# Altium PCB COMS0012_Comms_Board_Miniaturization.PcbDoc
Units mm, origin at the board's own origin, x right, y up, seen from the top; angles counter-clockwise.
Board outline 70 x 30 mm, 4 copper layers (Top, VCC, GND, Bottom); 55 components, 87 nets, 274 pads, 157 vias.
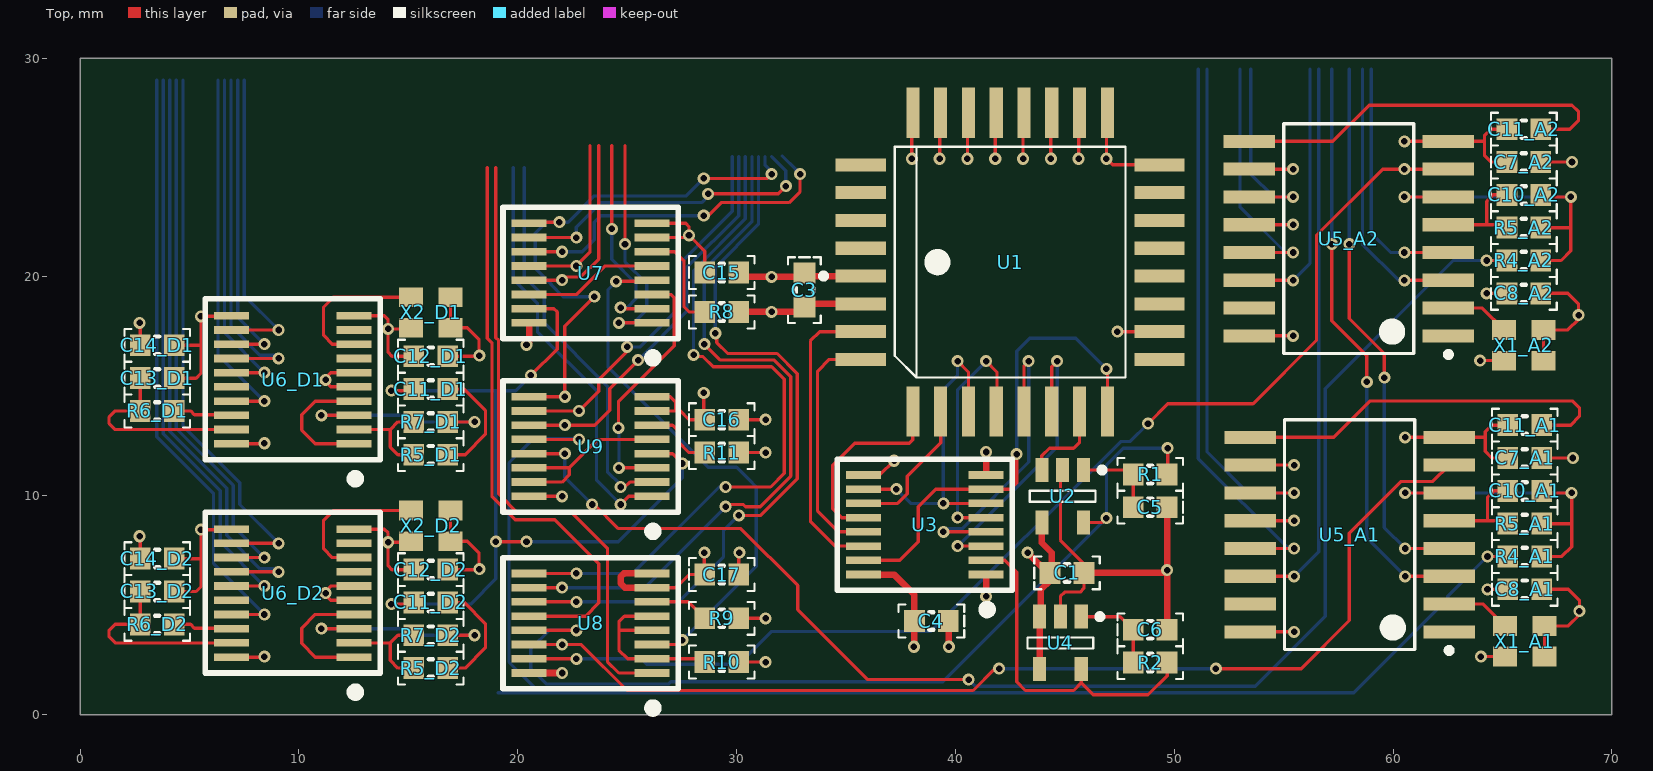
[diagram p0: Top view]
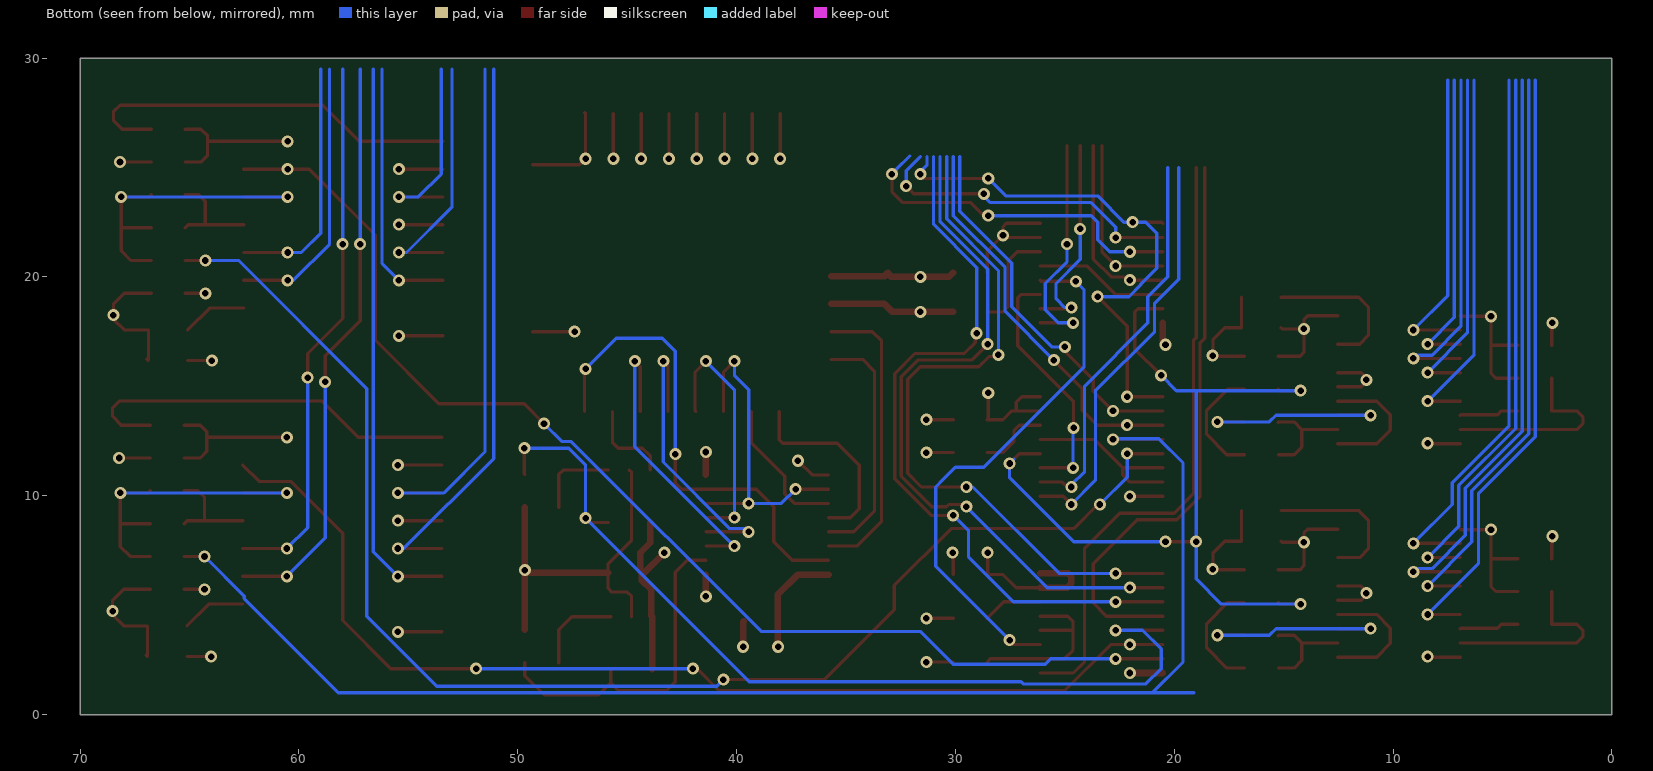
[diagram p1: Bottom view, seen from below]
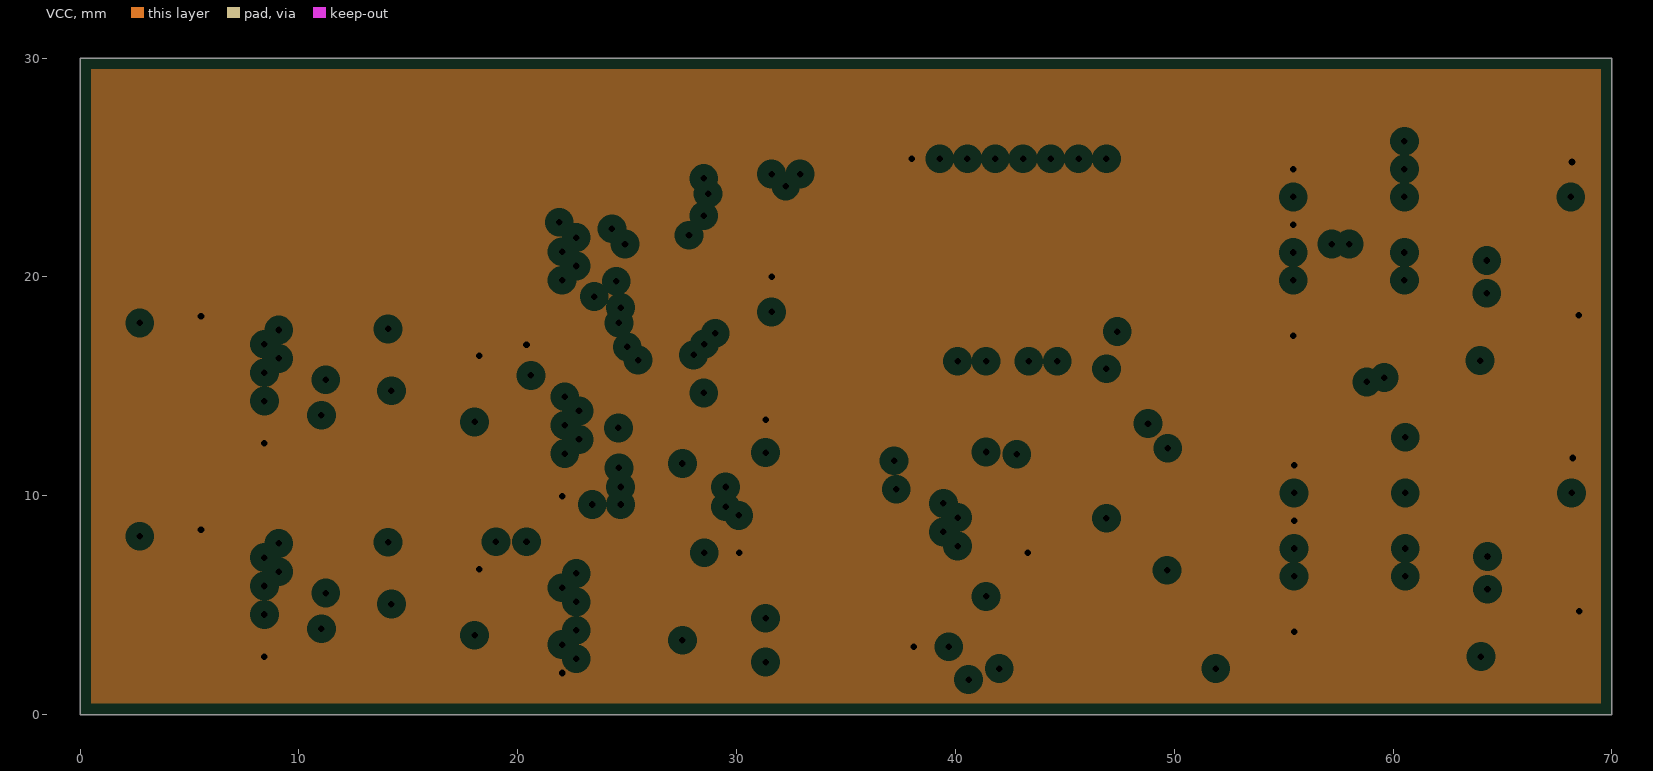
[diagram p2: VCC, clearances drawn from the general rule]
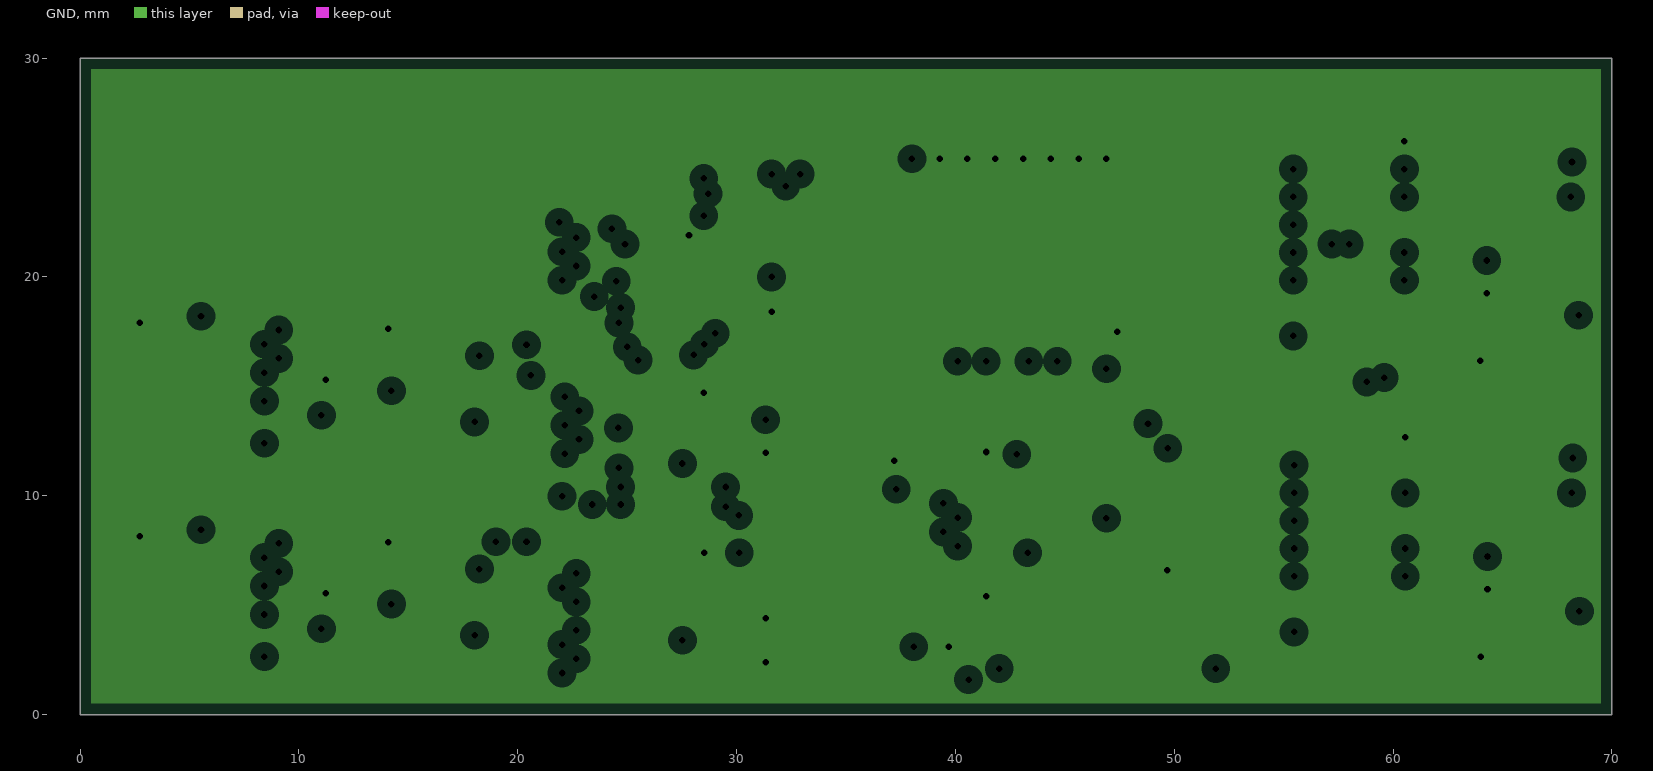
[diagram p3: GND, clearances drawn from the general rule]

## Layer stack, top to bottom
Top: signal copper 0.05
Dielectric: core 0.32, FR-4, Dk 4.8
VCC: plane copper 0.0356, net VCC
Dielectric: prepreg 0.32, FR-4, Dk 4.8
GND: plane copper 0.0356, net GND
Dielectric: core 0.32, FR-4, Dk 4.8
Bottom: signal copper 0.05

## Board outline
0,0 0,30 70,30 70,0

## Design rules (kind name [scope] priority, off if disabled: settings)
AcuteAngle [All] p1: minimum=4.50000000000000E+0001 checktracksonly=TRUE
Clearance [All] p1: gap=0.15
HoleSize [All] p1: absolutevalues=TRUE maxlimit=1 minlimit=0.25 maxpercent=80.000 minpercent=20.000
MinimumSolderMaskSliver [All] p1: minsoldermaskwidth=0.05
PasteMaskExpansion [All] p1: expansion=0.1
PlaneClearance [All] p1: clearance=0.508
PlaneConnect [All] p1: planeconnectstyle=Direct reliefexpansion=0.508 reliefentries=4 reliefconductorwidth=0.254 reliefairgap=0.254
PolygonConnect [All] p1: connectstyle=Direct reliefconductorwidth=0.254 reliefentries=4 polygonreliefangle="90 Angle"
RoutingVias [All] p1: holewidth=0.3 width=0.55 viastyle="Through Hole" minholewidth=0.3 minwidth=0.55 maxholewidth=0.7 maxwidth=1.2
SilkToSilkClearance [All] p1: silktosilkclearance=0
SilkscreenOverComponentPads [All] p1: minsilkscreentomaskgap=0.1
SolderMaskExpansion [All] p1: expansion=0.05
Width "Power Width" [InNet('VCC') OR InNet('GND')] p1: maxlimit=0.5 minlimit=0.15 preferedwidth=0.3
Width "Signal Width" [All] p2: maxlimit=0.5 minlimit=0.15 preferedwidth=0.15
21 further rules are at their usual default settings.

## Classes and differential pairs
channel class COMS0003_DTMF: D1 D2
channel class COMS0002_AFSK: A1 A2
net class SWC[7..0]: SWC0 SWC1 SWC2 SWC3 SWC4 SWC5 SWC6 SWC7
net class ADDRESS[7..0]: ADDRESS0 ADDRESS1 ADDRESS2 ADDRESS3 ADDRESS4 ADDRESS5 ADDRESS6 ADDRESS7
component class U_TXDevMux: C16 R9 R10 U8
component class U_RadioMux: C15 R8 U7
component class U_ModemRXMux: C17 R11 U9
component class D2: C11_D2 C12_D2 C13_D2 C14_D2 R5_D2 R6_D2 R7_D2 U6_D2 X2_D2
component class D1: C11_D1 C12_D1 C13_D1 C14_D1 R5_D1 R6_D1 R7_D1 U6_D1 X2_D1
component class Beacon: C1 C3 C4 C5 C6 R1 R2 U1 U2 U3 U4
component class A2: C7_A2 C8_A2 C9_A2 C10_A2 C11_A2 R3_A2 R4_A2 R5_A2 U5_A2 X1_A2
component class A1: C7_A1 C8_A1 C9_A1 C10_A1 C11_A1 R3_A1 R4_A1 R5_A1 U5_A1 X1_A1

## Components (designator, comment, footprint, x,y, rotation, side; value= is the part's Value field where it differs from the comment)
C1 "Capacitor, ceramic" CAP0603 45.1,6.475 r0 top
C3 "Capacitor, ceramic" CAP0603 33.1,19.4 r270 top
C4 "Capacitor, ceramic" CAP0603 38.9,4.275 r180 top
C5 "Capacitor, ceramic" CAP0603 48.9,9.475 r180 top
C6 "Capacitor, ceramic" CAP0603 48.9,3.875 r0 top
C7_A1 "Capacitor, ceramic" CAP0603 66.015,11.725 r0 top
C7_A2 "Capacitor, ceramic" CAP0603 65.976,25.251 r0 top
C8_A1 "Capacitor, ceramic" CAP0603 66.015,5.725 r0 top
C8_A2 "Capacitor, ceramic" CAP0603 65.976,19.251 r0 top
C10_A1 "Capacitor, ceramic" CAP0603 66.015,10.225 r0 top
C10_A2 "Capacitor, ceramic" CAP0603 65.976,23.751 r0 top
C11_A1 "Capacitor, ceramic" CAP0603 66.015,13.225 r0 top
C11_A2 "Capacitor, ceramic" CAP0603 65.976,26.751 r0 top
C11_D1 "Capacitor, ceramic" CAP0603 16.025,14.875 r180 top
C11_D2 "Capacitor, ceramic" CAP0603 16.025,5.125 r180 top
C12_D1 "Capacitor, ceramic" CAP0603 16.025,16.375 r0 top
C12_D2 "Capacitor, ceramic" CAP0603 16.025,6.625 r0 top
C13_D1 "Capacitor, ceramic" CAP0603 3.525,15.375 r0 top
C13_D2 "Capacitor, ceramic" CAP0603 3.525,5.625 r0 top
C14_D1 "Capacitor, ceramic" CAP0603 3.525,16.875 r0 top
C14_D2 "Capacitor, ceramic" CAP0603 3.525,7.125 r0 top
C15 "Capacitor, ceramic" CAP0603 29.325,20.2 r0 top
C16 "Capacitor, ceramic" CAP0603 29.325,13.475 r0 top
C17 "Capacitor, ceramic" CAP0603 29.325,6.4 r0 top
R1 "Res1" RES0603 48.9,10.975 r180 top
R2 "Res1" RES0603 48.9,2.375 r0 top
R4_A1 "Res1" RES0603 66.015,7.225 r0 top
R4_A2 "Res1" RES0603 65.976,20.751 r0 top
R5_A1 "Res1" RES0603 66.015,8.725 r0 top
R5_A2 "Res1" RES0603 65.976,22.251 r0 top
R5_D1 "Res1" RES0603 16.025,11.875 r0 top
R5_D2 "Res1" RES0603 16.025,2.125 r0 top
R6_D1 "Res1" RES0603 3.525,13.875 r180 top
R6_D2 "Res1" RES0603 3.525,4.125 r180 top
R7_D1 "Res1" RES0603 16.025,13.375 r180 top
R7_D2 "Res1" RES0603 16.025,3.625 r180 top
R8 "Res1" RES0603 29.325,18.4 r0 top
R9 "Res1" RES0603 29.325,4.4 r180 top
R10 "Res1" RES0603 29.325,2.4 r180 top
R11 "Res1" RES0603 29.325,11.975 r180 top
U1 "AT27LV256" PLCC32 42.5,20.675 r90 top
U2 "IttyBitty Timer" SOT23-5 44.9,9.975 r270 top
U3 "CD4520BPW" TSSOP16 38.6,8.675 r90 top
U4 "IttyBitty Timer" SOT23-5 44.8,3.275 r270 top
U5_A1 "MX614DW" SOIC16 58.015,8.225 r180 top
U5_A2 "MX614DW" SOIC16 57.976,21.751 r180 top
U6_D1 "MT88L70AN" TSSOP20 12.525,12.375 r90 top
U6_D2 "MT88L70AN" TSSOP20 12.525,2.625 r90 top
U7 "CD4053BCM" TSSOP16 23.325,20.175 r90 top
U8 "CD4051BCM" TSSOP16 23.325,4.175 r90 top
U9 "CD4053BCM" TSSOP16 23.325,12.25 r90 top
X1_A1 "ECS-2025-035" ECS-2025 66.015,3.351 r180 top
X1_A2 "ECS-2025-035" ECS-2025 65.976,16.876 r180 top
X2_D1 "ECS-2025-035" ECS-2025 16.025,18.375 r180 top
X2_D2 "ECS-2025-035" ECS-2025 16.025,8.625 r180 top

## Footprints (in the part's own frame and the unit in brackets; to place one, negate y for a bottom-side part, rotate by r counter-clockwise, add the part's x,y. Pads: shape width x height; smd on the part's side, far side on the other; paste and mask are expansions set on the pad)
CAP0603 [mm] "0603 Capacitor, Medium Density"
  rect 0.95x1 smd: 1(-0.775,0) 2(0.775,0)
  silkscreen extent -1.5,-0.75 1.5,0.75, body extent -0.8,-0.48 0.8,0.47, height 0.55
ECS-2025 [mm] "SMD Clock Oscillator"
  rect 1.1x0.9 smd: 1(-0.9,0.7) 2(0.9,0.7) 3(0.9,-0.7) 4(-0.9,-0.7)
PLCC32 [mm] "PLCC, 32-Leads, Body 15.1x15.1mm (max), Pitch 1.270mm, IPC Medium Density"
  rect 0.6x2.3 smd: 1(-0.635,6.825) 2(-1.905,6.825) 3(-3.175,6.825) 4(-4.445,6.825) 13(-4.445,-6.825) 14(-3.175,-6.825) 15(-1.905,-6.825) 16(-0.635,-6.825) 17(0.635,-6.825) 18(1.905,-6.825) 19(3.175,-6.825) 20(4.445,-6.825) 29(4.445,6.825) 30(3.175,6.825) 31(1.905,6.825) 32(0.635,6.825)
  rect 2.3x0.6 smd: 5(-6.825,4.445) 6(-6.825,3.175) 7(-6.825,1.905) 8(-6.825,0.635) 9(-6.825,-0.635) 10(-6.825,-1.905) 11(-6.825,-3.175) 12(-6.825,-4.445) 21(6.825,-4.445) 22(6.825,-3.175) 23(6.825,-1.905) 24(6.825,-0.635) 25(6.825,0.635) 26(6.825,1.905) 27(6.825,3.175) 28(6.825,4.445)
  silkscreen extent -5.27,-5.28 5.28,8.65, body extent -7.02,-7.02 7.02,7.02, height 3.56
RES0603 [mm] "0603 Resistor, Medium Density"
  rect 0.95x1 smd: 1(-0.775,0) 2(0.775,0)
  silkscreen extent -1.5,-0.75 1.5,0.75, body extent -0.8,-0.48 0.8,0.47, height 0.55
SOIC16 [mm] "SOIC, 16-Leads, Body 10.5x7.6mm (max), Pitch 1.27mm, IPC Medium Density"
  rect 2.35x0.6 smd: 1(-4.55,4.445) 2(-4.55,3.175) 3(-4.55,1.905) 4(-4.55,0.635) 5(-4.55,-0.635) 6(-4.55,-1.905) 7(-4.55,-3.175) 8(-4.55,-4.445) 9(4.55,-4.445) 10(4.55,-3.175) 11(4.55,-1.905) 12(4.55,-0.635) 13(4.55,0.635) 14(4.55,1.905) 15(4.55,3.175) 16(4.55,4.445)
  silkscreen extent -4.68,-5.25 2.97,5.42, body extent -3.8,-5.24 3.79,5.25, height 2.67
SOT23-5 [mm] "SOT23, 5-Leads, Body 3.0x3.0mm (max), Pitch 0.95mm, IPC Medium Density"
  rect 1.1x0.6 smd: 1(-1.2,0.95) 2(-1.2,0) 3(-1.2,-0.95) 4(1.2,-0.95) 5(1.2,0.95)
  silkscreen extent -1.32,-1.5 0.25,1.93, body extent -0.85,-1.5 0.85,1.5, height 1.45
TSSOP16 [mm] "Thin Small Outline Package"
  rect 0.35x1.6 smd: 1(-2.275,-2.8) 2(-1.625,-2.8) 3(-0.975,-2.8) 4(-0.325,-2.8) 5(0.325,-2.8) 6(0.975,-2.8) 7(1.625,-2.8) 8(2.275,-2.8) 9(2.275,2.8) 10(1.625,2.8) 11(0.975,2.8) 12(0.325,2.8) 13(-0.325,2.8) 14(-0.975,2.8) 15(-1.625,2.8) 16(-2.275,2.8)
  silkscreen extent -4.07,-4 3,4, body extent -2.55,-2.25 2.55,2.25, height 1.2
TSSOP20 [mm] "Thin Small Outline Package"
  rect 0.35x1.6 smd: 1(0,0) 2(0.65,0) 3(1.3,0) 4(1.95,0) 5(2.6,0) 6(3.25,0) 7(3.9,0) 8(4.55,0) 9(5.2,0) 10(5.85,0) 11(5.85,5.6) 12(5.2,5.6) 13(4.55,5.6) 14(3.9,5.6) 15(3.25,5.6) 16(2.6,5.6) 17(1.95,5.6) 18(1.3,5.6) 19(0.65,5.6) 20(0,5.6)
  silkscreen extent -1.8,-1.2 6.63,6.8, body extent -0.27,0.55 6.17,5.05, height 1.2

## Part data
C1 C3 C4 C5 C6 C12_D1 C12_D2 C13_D1 C13_D2: library part "Cap 0402", "Capacitor"
C7_A1 C7_A2 C8_A1 C8_A2 C10_A1 C10_A2 C11_A1 C11_A2 C11_D1 C11_D2 C14_D1 C14_D2 C15 C16 C17: library part CAP0603, "Capacitor"
R1 R2 R6_D1 R6_D2 R7_D1 R7_D2: library part Res3, "Resistor"
R4_A1 R4_A2 R5_A1 R5_A2 R5_D1 R5_D2 R8 R9 R10 R11: library part RES0603, "Resistor"
U1: "256 Kbit (32Kb X 8) UV EPROM and OTP EPROM"
U2 U4: library part MIC1557, "Miniature Astable Timer Chip"
U3: "Dual Binary Up-Counter"
U5_A1 U5_A2: "Bell 202 Compatible Modem, SOIC"
U6_D1 U6_D2: "3 Volt Integrated DTMF Receiver"
U7 U9: "Triple 2-Channnel Analog Multiplexer/Demutiplexer"
U8: "8-Channel Analog Multiplexer/Demultiplexer"
X1_A1 X1_A2 X2_D1 X2_D2: "SMD Clock Oscillator, 3.579545MHz"

## Via types
v1: diameter 0.55, hole 0.3, Top to Bottom, 157 vias

## Nets (pads, with @x,y where several pads share a name; then routed paths per layer and width w, separated by ;. In a path a pad name is that pad's centre, name@x,y a point inside that pad or via, vN(x,y) a via of type N, cw(c..) or ccw(c..) an arc to the next point about the centre after c; other vN are vias at no path point)
ADDRESS0: U1.10 U3.3 | length 14
  Top w0.15: v1(40.1,7.7) U3.3 ; U1.10 44.405,15.905 v1(44.65,16.15)
  Bottom w0.15: v1(40.1,7.7) 44.65,12.25 v1(44.65,16.15)
ADDRESS1: U1.9 U3.4 | length 14.2
  Top w0.15: v1(39.45,8.35) U3.4 ; U1.9 43.135,15.935 v1(43.35,16.15)
  Bottom w0.15: v1(39.45,8.35) 39.6,8.5 40.307,8.5 43.35,11.543 v1(43.35,16.15)
ADDRESS2: U1.8 U3.5 | length 11.5
  Top w0.15: v1(40.1,9) U3.5 ; v1(41.4,16.15) 41.9,15.65 41.9,13.885 U1.8
  Bottom w0.15: v1(40.1,9) 40.1,14.85 v1(41.4,16.15)
ADDRESS3: U1.7 U3.6 U3.10 | length 15.1
  Top w0.15: U3.10 v1(37.3,10.3) ; v1(39.45,9.65) U3.6 ; v1(40.1,16.15) 40.595,15.655 U1.7
  Bottom w0.15: v1(37.3,10.3) 37.95,9.65 v1(39.45,9.65) 39.45,14.85 40.1,15.5 v1(40.1,16.15)
ADDRESS4: U1.6 U3.11 | length 6.6
  Top w0.15: U3.11 37.357,9.65 37.8,10.093 37.8,10.9 39.325,12.425 U1.6
ADDRESS5: U1.5 U3.12 | length 9
  Top w0.15: U3.12 34.8,9 34.4,9.4 34.4,11.4 35.4,12.4 37.9,12.4 38.055,12.555 U1.5
ADDRESS6: U1.4 U3.13 | length 11.1
  Top w0.15: U1.4 34.23,16.23 33.7,15.7 33.7,9.3 34.65,8.35 U3.13
ADDRESS7: U1.3 U3.14 | length 13.6
  Top w0.15: U1.3 33.8,17.5 33.375,17.075 33.375,8.825 34.5,7.7 U3.14
AFSK1_DET: U5_A1.14 | length 25.7
  Top w0.15: U5_A1.14 v1(55.475,6.32)
  Bottom w0.15: v1(55.475,6.32) 56.6,7.446 56.6,29.5
AFSK1_M0: U5_A1.3 | length 26.6
  Top w0.15: v1(57.2,21.5) 57.2,18 58.8,16.4 v1(58.8,15.2) ; v1(60.555,6.32) U5_A1.3
  Bottom w0.15: v1(57.2,21.5) 57.2,29.5 ; v1(58.8,15.2) 58.8,8.075 v1(60.555,6.32)
AFSK1_M1: U5_A1.4 | length 25
  Top w0.15: v1(58,21.5) 58,18.1 59.6,16.5 v1(59.6,15.4) ; v1(60.555,7.59) U5_A1.4
  Bottom w0.15: v1(58,21.5) 58,29.5 ; v1(59.6,15.4) 59.6,8.545 v1(60.555,7.59)
AFSK1_RX: R4_A1.1 U9.12 | length 65.8
  Top w0.15: U9.12 v1(22.8,12.575) ; v1(64.315,7.225) R4_A1.1
  Bottom w0.15: 19.1,1 21,1 ; v1(22.8,12.575) 22.775,12.6 20.7,12.6 19.6,11.5 19.6,2.4 21,1 ; v1(64.315,7.225) 62.5,5.411 62.5,5.3 58.2,1 21,1
AFSK1_RXD: U5_A1.13 | length 25.9
  Top w0.15: U5_A1.13 v1(55.475,7.59)
  Bottom w0.15: 51.1,29.5 51.1,11.7 55.21,7.59 v1(55.475,7.59)
AFSK1_TX: U5_A1.7 U8.14 | length 49.5
  Top w0.15: U8.14 v1(22.025,3.2) 22.901,3.2 25.001,1.1 40.807,1.1 41.807,2.1 v1(42,2.1) ; v1(51.9,2.1) 55.8,2.1 58,4.3 58,8.283 60.373,10.655 61.82,10.655 U5_A1.7
  Bottom w0.15: v1(42,2.1) v1(51.9,2.1)
AFSK1_TXD: U5_A1.11 | length 24.3
  Top w0.15: U5_A1.11 v1(55.475,10.13)
  Bottom w0.15: 51.5,29.5 51.5,12 53.37,10.13 v1(55.475,10.13)
AFSK2_DET: U5_A2.14 | length 12
  Top w0.15: U5_A2.14 v1(55.436,19.846)
  Bottom w0.15: v1(55.436,19.846) 56.2,20.61 56.2,29.5
AFSK2_M0: U5_A2.3 | length 12.6
  Top w0.15: v1(60.516,19.846) U5_A2.3
  Bottom w0.15: 58.6,29.5 58.6,21.5 60.254,19.846 v1(60.516,19.846)
AFSK2_M1: U5_A2.4 | length 11.4
  Top w0.15: v1(60.516,21.116) U5_A2.4
  Bottom w0.15: 59,29.5 59,22 59.884,21.116 v1(60.516,21.116)
AFSK2_RX: R4_A2.1 U9.13 | length 64.5
  Top w0.15: U9.13 v1(22.15,11.925) ; v1(23.4,9.6) 23.5,9.6 24.6,8.5 30.2,8.5 32.8,5.9 32.8,4.8 36,1.6 v1(40.6,1.6) ; v1(64.276,20.751) R4_A2.1
  Bottom w0.15: v1(22.15,11.925) 22.15,10.85 v1(23.4,9.6) ; v1(40.6,1.6) 40.9,1.3 53.701,1.3 56.9,4.499 56.9,14.9 62.751,20.751 v1(64.276,20.751)
AFSK2_RXD: U5_A2.13 | length 11.6
  Top w0.15: U5_A2.13 v1(55.436,21.116)
  Bottom w0.15: 53,29.5 53,23.2 55.084,21.116 v1(55.436,21.116)
AFSK2_TX: U5_A2.7 U8.15 | length 54.3
  Top w0.15: U8.15 v1(22.675,2.55) ; v1(48.8,13.3) 49.7,14.2 53.6,14.2 56.5,17.1 56.5,21.9 59.526,24.926 v1(60.516,24.926) U5_A2.7
  Bottom w0.15: v1(22.675,2.55) 25.65,2.55 25.9,2.3 30.1,2.3 31.6,3.8 38.876,3.8 47.551,12.475 47.975,12.475 v1(48.8,13.3)
AFSK2_TXD: U5_A2.11 | length 9.2
  Top w0.15: U5_A2.11 v1(55.436,23.656)
  Bottom w0.15: 53.5,29.5 53.5,24.7 54.544,23.656 v1(55.436,23.656)
BCN: R1.1 U2.5 U8.13 | length 43.2
  Top w0.15: U8.13 v1(22.675,3.85) ; U2.5 46.7,8.775 v1(46.9,8.975) ; R1.1 49.7,11 v1(49.7,12.175)
  Bottom w0.15: v1@22.725,3.8 v1(22.675,3.85) 21.45,3.85 20.6,3 20.6,2.1 21.3,1.4 26.9,1.4 27,1.5 39.425,1.5 v1(46.9,8.975) 46.9,11.4 47.675,12.175 v1(49.7,12.175)
COUNTER_CLK: R2.2 U3.2 U4.5 | length 15.6
  Top w0.15: U3.2 42.25,7.05 42.8,6.5 42.8,1.5 43.2,1.1 45.4,1.1 45.75,1.45 ; U4.5 45.75,1.45 ; R2.2 49.675,1.775 48.8,0.9 46.3,0.9 45.75,1.45
DTMF1_Q1: U6_D1.12 | length 14.2
  Top w0.15: U6_D1.12 v1(9.075,17.575)
  Bottom w0.15: 7.5,29 7.5,19.15 v1(9.075,17.575)
DTMF1_Q2: U6_D1.13 | length 14.1
  Top w0.15: U6_D1.13 v1(8.425,16.925)
  Bottom w0.15: 7.2,29 7.2,18.15 v1(8.425,16.925)
DTMF1_Q3: U6_D1.14 | length 16.2
  Top w0.15: U6_D1.14 v1(9.075,16.275)
  Bottom w0.15: 6.9,29 6.9,17.743 8.218,16.425 8.925,16.425 v1(9.075,16.275)
DTMF1_Q4: U6_D1.15 | length 15.6
  Top w0.15: U6_D1.15 v1(8.425,15.625)
  Bottom w0.15: 6.6,29 6.6,17.45 v1(8.425,15.625)
DTMF1_STD: U6_D1.17 | length 17.1
  Top w0.15: U6_D1.17 v1(8.425,14.325)
  Bottom w0.15: 6.3,29 6.3,16.45 v1(8.425,14.325)
DTMF2_Q1: U6_D2.12 | length 25.1
  Top w0.15: U6_D2.12 v1(9.075,7.825)
  Bottom w0.15: 4.7,29 4.7,13.197 7.3,10.597 7.3,9.6 v1(9.075,7.825)
DTMF2_Q2: U6_D2.13 | length 25
  Top w0.15: U6_D2.13 v1(8.425,7.175)
  Bottom w0.15: 4.4,29 4.4,13.073 7,10.473 7,8.6 v1(8.425,7.175)
DTMF2_Q3: U6_D2.14 | length 27.1
  Top w0.15: U6_D2.14 v1(9.075,6.525)
  Bottom w0.15: 4.1,29 4.1,12.949 6.7,10.349 6.7,8.193 8.218,6.675 8.925,6.675 v1(9.075,6.525)
DTMF2_Q4: U6_D2.15 | length 26.5
  Top w0.15: U6_D2.15 v1(8.425,5.875)
  Bottom w0.15: 3.8,29 3.8,12.824 6.4,10.224 6.4,7.9 v1(8.425,5.875)
DTMF2_STD: U6_D2.17 | length 28
  Top w0.15: U6_D2.17 v1(8.425,4.575)
  Bottom w0.15: 3.5,29 3.5,12.7 6.1,10.1 6.1,6.9 v1(8.425,4.575)
DTMF_RX: C11_D1.2 C11_D2.2 U7.15 U9.4 | length 39.6
  Top w0.15: v1(14.225,5.05) 15.175,5.05 C11_D2.2 ; v1(14.225,14.8) 15.175,14.8 C11_D1.2 ; v1(19,7.9) v1(20.4,7.9) ; U7.15 21.65,18.55 21.8,18.4 21.8,16.7 v1(20.6,15.5) ; U9.4 27.075,11.925 v1(27.525,11.475)
  Bottom w0.15: v1(14.225,5.05) 17.85,5.05 19,6.2 v1(19,7.9) 19,14.8 ; v1(14.225,14.8) 19,14.8 ; v1(20.4,7.9) 24.6,7.9 27.525,10.825 v1(27.525,11.475) 27.325,11.675 ; v1(20.6,15.5) 19.9,14.8 19,14.8
GMSK1_RX: U9.2 | length 17.9
  Top w0.15: v1(24.7,10.4) 24.9,10.4 25.125,10.625 U9.2
  Bottom w0.15: 20.3,25 20.3,20 21.207,19.093 21.207,17.9 24.1,15.007 24.1,13.9 24.1,13.407 24.1,11.093 24.7,10.493 v1(24.7,10.4)
GMSK1_TX: U8.12 | length 26.5
  Top w0.15: 18.6,25 18.6,17.199 18.825,16.974 18.825,9.958 19.883,8.9 21.7,8.9 23.7,6.9 23.7,5.1 23.1,4.5 U8.12
GMSK2_RX: U9.1 | length 19
  Top w0.15: v1(24.7,9.6) 25.075,9.975 U9.1
  Bottom w0.15: 19.8,25 19.8,19.9 20.9,18.8 20.9,17.5 23.6,14.8 23.6,10.7 v1(24.7,9.6)
GMSK2_TX: U8.1 | length 28.4
  Top w0.15: 19,25 19,17.224 19.125,17.099 19.125,10.082 20.007,9.2 22.5,9.2 24.1,7.6 24.1,2.425 24.625,1.9 U8.1
GND: C1.2 C3.2 C4.1 C5.1 C6.2 C7_A1.1 C7_A2.1 C8_A1.1 C8_A2.1 C11_A1.1 C11_A2.1 C12_D1.1 C12_D2.1 C14_D1.1 C14_D2.1 C15.1 C16.1 C17.1 R8.2 R9.1 R10.1 R11.1 U1.2 U1.14 U1.20 U1.21 U1.22 U1.23 U1.24 U1.25 U1.26 U1.27 U2.2 U3.1 U3.8 U3.9 U4.2 U5_A1.8 U5_A2.8 U6_D1.5 U6_D1.6 U6_D1.10 U6_D2.5 U6_D2.6 U6_D2.10 U7.7 U7.8 U8.7 U8.8 U9.7 U9.8 X1_A1.2 X1_A2.2 X2_D1.2 X2_D2.2 | length 105.8
  Top w0.15: v1(2.725,8.15) 2.75,8.125 C14_D2.1 ; v1(2.725,17.9) 2.75,17.875 C14_D1.1 ; U6_D2.5 11.45,5.225 11.225,5.45 11.225,5.65 11.45,5.875 U6_D2.6 ; U6_D2.10 13.9,8.475 14.075,8.3 v1(14.075,7.875) ; U6_D1.5 11.45,14.975 11.225,15.2 11.225,15.4 11.45,15.625 U6_D1.6 ; U6_D1.10 13.9,18.225 14.075,18.05 v1(14.075,17.625) ; X2_D2.2 15.075,7.875 v1(14.075,7.875) ; X2_D1.2 15.075,17.625 v1(14.075,17.625) ; C12_D2.1 14.25,6.625 14.075,6.8 v1(14.075,7.875) ; C12_D1.1 14.25,16.375 14.075,16.55 v1(14.075,17.625) ; U8.7 27.225,5.8 27.825,6.4 C17.1 28.525,6.425 v1(28.525,7.4) ; U9.7 27.225,13.875 ; U9.8 26.975,14.525 27.225,14.275 27.225,13.875 ; U7.7 27.725,21.8 v1(27.825,21.9) ; U7.8 27.675,22.45 27.825,22.3 v1(27.825,21.9) ; v1(28.5,14.7) 28.5,13.525 C16.1 27.825,13.475 27.425,13.875 27.225,13.875 ; C15.1 28.55,21.175 v1(27.825,21.9) ; R10.1 v1(31.325,2.4) ; R9.1 v1(31.325,4.4) ; R11.1 v1(31.325,11.975) ; U3.9 36.55,10.95 v1(37.2,11.6) ; v1(39.28,25.4) U1.27@39.28,27.455 ; v1(40.55,25.4) U1.26@40.55,27.455 ; v1(41.82,25.4) U1.25@41.82,27.455 ; v1(43.09,25.4) U1.24@43.09,27.455 ; v1(44.36,25.4) U1.23@44.36,27.455 ; U4.2 44.8,5.4 45,5.6 45.7,5.6 45.875,5.775 C1.2 45.875,6.9 44.8,7.975 44.8,11.075 U2.2 ; v1(45.63,25.4) U1.22@45.63,27.455 ; U1.21 46.9,27.455 v1(46.9,25.4) 47.18,25.12 U1.20 ; v1(47.4,17.5) U1.14 ; v1(60.516,26.196) U5_A2.8 64.131,26.196 64.176,26.151 ; v1(60.555,12.67) U5_A1.8 64.17,12.67 64.215,12.625 ; v1(63.976,16.176) X1_A2.2 ; v1(64.015,2.651) X1_A1.2 ; v1(64.276,19.251) C8_A2.1 ; v1(64.315,5.725) C8_A1.1 ; C7_A2.1 64.476,25.251 64.176,25.551 64.176,26.151 ; C11_A2.1 64.476,26.751 64.176,26.451 64.176,26.151 ; C7_A1.1 64.515,11.725 64.215,12.025 64.215,12.625 ; C11_A1.1 64.515,13.225 64.215,12.925 64.215,12.625
  Top w0.3: U8.7 24.9,5.8 24.7,6 24.7,6.3 24.85,6.45 U8.8 ; R8.2 v1(31.6,18.4) 32.875,18.4 C3.2 33.245,18.77 U1.2 ; C4.1 39.7,4.25 v1(39.7,3.1) ; v1(41.4,5.4) U3.1 ; U3.8 v1(41.4,12) ; C1.2 49.55,6.475 v1(49.675,6.6) ; C6.2 v1(49.675,6.6) ; C5.1 v1(49.675,6.6)
  other v1: 11.225,5.55 11.225,15.3
NetC5_2: C5.2 R1.2 U2.1 | length 3.9
  Top w0.15: U2.1 47.925,11.175 R1.2 C5.2
NetC6_1: C6.1 R2.1 U4.1 | length 4.1
  Top w0.15: U4.1 47.525,4.475 C6.1 R2.1
NetC10_A1_1: C10_A1.1 R5_A1.1 U5_A1.5 | length 4.8
  Top w0.15: U5_A1.5 64.315,8.86 ; R5_A1.1 65.105,8.86 64.315,8.86 ; C10_A1.1 64.615,10.225 64.315,9.925 64.315,8.86
NetC10_A1_2: C10_A1.2 R4_A1.2 R5_A1.2 U5_A1.6 | length 16.4
  Top w0.15: v1(60.555,10.13) U5_A1.6 ; R4_A1.2 67.715,7.225 68.16,7.67 68.16,8.725 ; R5_A1.2 68.16,8.725 ; C10_A1.2 66.885,10.13 v1(68.16,10.13) 68.16,8.725
  Bottom w0.15: v1(60.555,10.13) v1(68.16,10.13)
NetC10_A2_1: C10_A2.1 R5_A2.1 U5_A2.5 | length 4.8
  Top w0.15: U5_A2.5 64.276,22.386 ; R5_A2.1 65.066,22.386 64.276,22.386 ; C10_A2.1 64.576,23.751 64.276,23.451 64.276,22.386
NetC10_A2_2: C10_A2.2 R4_A2.2 R5_A2.2 U5_A2.6 | length 16.4
  Top w0.15: v1(60.516,23.656) U5_A2.6 ; R4_A2.2 67.676,20.751 68.121,21.196 68.121,22.251 ; R5_A2.2 68.121,22.251 ; C10_A2.2 66.846,23.656 v1(68.121,23.656) 68.121,22.251
  Bottom w0.15: v1(60.516,23.656) v1(68.121,23.656)
NetC11_A1_2: C11_A1.2 U5_A1.9 | length 18.2
  Top w0.15: U5_A1.9 57.285,12.67 58.94,14.325 68.215,14.325 68.515,14.025 68.515,13.625 68.115,13.225 C11_A1.2
NetC11_A2_2: C11_A2.2 U5_A2.9 | length 18.2
  Top w0.15: U5_A2.9 57.246,26.196 58.901,27.851 68.176,27.851 68.476,27.551 68.476,27.151 68.076,26.751 C11_A2.2
NetC11_D1_1: C11_D1.1 R5_D1.2 | length 5.3
  Top w0.15: R5_D1.2 17.6,11.875 18.525,12.8 18.525,13.9 17.55,14.875 C11_D1.1
NetC11_D2_1: C11_D2.1 R5_D2.2 | length 5.3
  Top w0.15: R5_D2.2 17.6,2.125 18.525,3.05 18.525,4.15 17.55,5.125 C11_D2.1
NetC13_D1_1: C13_D1.1 R6_D1.2 U6_D1.19 | length 9.1
  Top w0.15: C13_D1.1 R6_D1.2 1.6,13.875 1.325,13.6 1.325,13.3 1.6,13.025 U6_D1.19
NetC13_D2_1: C13_D2.1 R6_D2.2 U6_D2.19 | length 9.1
  Top w0.15: C13_D2.1 R6_D2.2 1.6,4.125 1.325,3.85 1.325,3.55 1.6,3.275 U6_D2.19
NetR5_D1_1: R5_D1.1 R7_D1.2 U6_D1.2 | length 4.9
  Top w0.15: U6_D1.2 14.175,13.025 ; R5_D1.1@15.225,11.875 14.525,11.875 14.175,12.225 14.175,13.025 ; R7_D1.2@15.25,13.35 15.225,13.375 14.525,13.375 14.175,13.025
NetR5_D2_1: R5_D2.1 R7_D2.2 U6_D2.2 | length 4.9
  Top w0.15: U6_D2.2 14.175,3.275 ; R5_D2.1@15.225,2.125 14.525,2.125 14.175,2.475 14.175,3.275 ; R7_D2.2@15.25,3.6 15.225,3.625 14.525,3.625 14.175,3.275
NetR6_D1_1: R6_D1.1 U6_D1.18 | length 2.7
  Top w0.15: R6_D1.1 5.05,13.875 5.225,13.7 6.9,13.7 U6_D1.18
NetR6_D2_1: R6_D2.1 U6_D2.18 | length 2.7
  Top w0.15: R6_D2.1 5.05,4.125 5.225,3.95 6.9,3.95 U6_D2.18
NetR7_D1_1: R7_D1.1 U6_D1.3 | length 9.8
  Top w0.15: v1(11.025,13.675) U6_D1.3 ; R7_D1.1 17.9,13.375 v1(18.025,13.375)
  Bottom w0.15: v1(11.025,13.675) 15.35,13.675 15.65,13.375 v1(18.025,13.375)
NetR7_D2_1: R7_D2.1 U6_D2.3 | length 9.8
  Top w0.15: v1(11.025,3.925) U6_D2.3 ; R7_D2.1 17.9,3.625 v1(18.025,3.625)
  Bottom w0.15: v1(11.025,3.925) 15.35,3.925 15.65,3.625 v1(18.025,3.625)
NetR8_1: R8.1 U7.6 | length 4.8
  Top w0.15: U7.6 27.175,21.15 27.6,20.725 27.6,18.625 27.825,18.4 R8.1
NetR9_2: R9.2 U8.6 | length 2.7
  Top w0.15: U8.6 27.8,5.15 R9.2
NetR10_2: R10.2 U8.2 U8.4 U8.5 | length 8.6
  Top w0.15: U8.4 24.675,3.85 24.625,3.9 ; U8.5 24.875,4.5 24.625,4.25 24.625,3.9 ; R10.2 28.4,2.55 U8.2 25.025,2.55 24.625,2.95 24.625,3.9
NetR11_2: R11.2 U9.6 | length 3.2
  Top w0.15: U9.6 27.075,13.225 27.325,12.975 27.325,12.475 27.825,11.975 R11.2
NetU5_A1_2: U5_A1.2 X1_A1.3 | length 3
  Top w0.15: U5_A1.2 64.115,5.05 X1_A1.3
NetU5_A2_2: U5_A2.2 X1_A2.3 | length 3
  Top w0.15: U5_A2.2 64.076,18.576 X1_A2.3
NetU6_D1_1: U6_D1.1 U6_D1.4 | length 6
  Top w0.15: U6_D1.1 10.75,12.375 10.125,13 10.125,13.7 10.75,14.325 U6_D1.4
NetU6_D1_8: U6_D1.8 X2_D1.3 | length 7.1
  Top w0.15: U6_D1.8 11.525,16.925 11.125,17.325 11.125,18.625 11.575,19.075 X2_D1.3
NetU6_D2_1: U6_D2.1 U6_D2.4 | length 6
  Top w0.15: U6_D2.1 10.75,2.625 10.125,3.25 10.125,3.95 10.75,4.575 U6_D2.4
NetU6_D2_8: U6_D2.8 X2_D2.3 | length 7.1
  Top w0.15: U6_D2.8 11.525,7.175 11.125,7.575 11.125,8.875 11.575,9.325 X2_D2.3
NetU7_3: U7.3 U9.3 | length 11.4
  Top w0.15: v1(24.6,13.1) 24.6,14.3 27.15,16.85 27.15,19.05 27,19.2 U7.3 ; v1(24.625,11.275) U9.3
  Bottom w0.15: v1(24.6,13.1) 24.6,13 24.625,12.975 v1(24.625,11.275)
NetU7_4: U7.4 U8.3 | length 24.7
  Top w0.15: v1@24.55,19.85 v1(24.5,19.8) 26.075,19.8 U7.4 ; U8.3 27.325,3.2 v1(27.525,3.4)
  Bottom w0.15: v1(24.5,19.8) 24.125,19.425 24.125,15.875 28.7,11.3 30,11.3 30.554,10.746 30.9,10.4 30.9,6.775 v1(27.525,3.4)
NetU7_5: U7.5 U7.14 | length 6.1
  Top w0.15: U7.14 22.7,19.2 24,20.5 U7.5
NetU9_5: U9.5 U9.14 U9.15 | length 8.4
  Top w0.15: U9.15 22.025,10.625 22.35,10.95 22.35,11.275 ; U9.14 22.35,11.275 ; U9.5 23.65,12.575 22.35,11.275
RESET: U1.12 U3.7 U3.15 | length 22.3
  Top w0.15: U3.15 37.45,7.05 38.3,7.9 38.3,9.5 39.1,10.3 U3.7 42.5,10.3 42.8,10.6 v1(42.8,11.9) ; v1(46.9,15.8) 46.945,15.755 U1.12
  Bottom w0.15: v1(42.8,11.9) 42.8,16.6 43.4,17.2 45.5,17.2 v1(46.9,15.8)
RX1: U7.2 | length 9.8
  Top w0.15: v1(24.3,22.2) 24.3,26 ; v1(24.7,18.6) 24.75,18.55 U7.2
  Bottom w0.15: v1(24.3,22.2) 24.3,20.8 25.4,19.7 25.4,19 25,18.6 v1(24.7,18.6)
RX2: U7.1 | length 10.9
  Top w0.15: v1(24.625,17.9) U7.1 ; v1(24.9,21.5) 24.9,26
  Bottom w0.15: v1(24.625,17.9) 25.3,17.9 25.9,18.5 25.9,19.7 24.9,20.7 v1(24.9,21.5)
SWC0: U9.10 | length 17.2
  Top w0.15: U9.10 v1(22.8,13.875) 23.7,14.775 23.7,15.3 25,16.6 v1(25,16.8)
  Bottom w0.15: v1(25,16.8) 25.6,16.8 27.432,18.632 27.432,20.632 29.8,23 29.8,25.5
SWC1: U9.11 | length 18
  Top w0.15: U9.11 v1(22.15,13.225) 23.525,13.225 24.2,13.9 24.2,14.9 v1(25.5,16.2)
  Bottom w0.15: v1(25.5,16.2) 27.732,18.432 27.732,20.432 30.1,22.8 30.1,23.8 30.1,25.5
SWC2: U8.9 | length 32.2
  Top w0.15: U8.9 v1(22.675,6.45) ; v1(28.037,16.437) 28.11,16.364 28.464,16.364 28.927,15.9 31.6,15.9 32.176,15.324 32.176,11.024 31.551,10.4 v1(29.5,10.4)
  Bottom w0.15: v1(22.675,6.45) 25.25,6.45 29.2,10.4 ; v1(28.037,16.437) 28.032,16.442 28.032,20.28 30.4,22.649 30.4,25.5
SWC3: U8.10 | length 32.7
  Top w0.15: U8.10 v1(22.025,5.8) ; v1(28.532,16.932) 29.264,16.2 31.724,16.2 32.476,15.449 32.476,10.9 31.076,9.5 30.407,9.5 30.307,9.6 29.6,9.6 v1(29.5,9.5)
  Bottom w0.15: v1(22.025,5.8) 25.8,5.8 v1(29.5,9.5) ; v1(28.532,16.932) 28.527,16.937 28.527,20.351 30.7,22.524 30.7,25.5
SWC4: U8.11 | length 33.7
  Top w0.15: U8.11 v1(22.675,5.15) ; v1(29.027,17.427) 29.1,17.354 29.1,17 29.6,16.5 31.849,16.5 32.776,15.573 32.776,10.776 31.1,9.1 v1(30.1,9.1)
  Bottom w0.15: v1(22.675,5.15) 27.35,5.15 29.4,7.2 29.4,8.4 v1(30.1,9.1) ; v1(29.027,17.427) 29.027,20.427 31,22.4 31,25.5
SWC5: U7.9 U9.9 | length 25.9
  Top w0.15: U9.9 v1(22.15,14.525) 22.15,17.75 v1(23.5,19.1) ; U7.9 20.575,22.5 v1(21.9,22.5) ; v1(28.5,24.5) 31.4,24.5 v1(31.6,24.7)
  Bottom w0.15: v1@23.507,19.1 v1(23.5,19.1) 22.068,19.1 21.525,19.643 21.525,19.675 20.8,20.4 20.8,22 21.3,22.5 v1(21.9,22.5) 22.3,22.5 23.5,23.7 27.7,23.7 v1(28.5,24.5) ; 31.3,25.5 31.3,25.1 31.6,24.8 v1(31.6,24.7)
SWC6: U7.10 | length 14.7
  Top w0.15: U7.10 v1(22.675,21.8) ; v1(28.7,23.8) 31.9,23.8 v1(32.25,24.15)
  Bottom w0.15: v1(22.675,21.8) 22.675,22.275 23.8,23.4 28.4,23.4 28.7,23.7 v1(28.7,23.8) ; 31.6,25.5 32.25,24.85 v1(32.25,24.15)
SWC7: U7.11 | length 15.7
  Top w0.15: U7.11 v1(22.025,21.15) ; v1(28.5,22.8) 28.7,22.8 29.3,23.4 32.4,23.4 32.9,23.9 v1(32.9,24.7)
  Bottom w0.15: v1(22.025,21.15) 22.95,21.15 23.5,21.7 23.5,22.5 23.8,22.8 v1(28.5,22.8) ; 32.087,25.526 32.7,24.913 32.7,24.9
TONE_ON: U1.11 U2.3 | length 4
  Top w0.15: U2.3 43.95,11.825 44.3,12.175 45.4,12.175 45.675,12.45 U1.11
TX1: U7.12 | length 8.1
  Top w0.15: U7.12 v1(22.675,20.5) ; v1@22.9,20.5 v1(22.675,20.5) ; 23.3,26 23.3,21.125 v1(22.675,20.5)
TX2: U7.13 | length 8.8
  Top w0.15: U7.13 v1(22.025,19.85) 22.175,20 22.882,20 23.7,20.818 23.7,26
VCC: C1.1 C3.1 C4.2 C7_A1.2 C7_A2.2 C8_A1.2 C8_A2.2 C12_D1.2 C12_D2.2 C13_D1.2 C13_D2.2 C14_D1.2 C14_D2.2 C15.2 C16.2 C17.2 U1.1 U1.28 U2.4 U3.16 U4.3 U4.4 U5_A1.10 U5_A1.12 U5_A1.16 U5_A2.10 U5_A2.12 U5_A2.16 U6_D1.11 U6_D1.20 U6_D2.11 U6_D2.20 U7.16 U8.16 U9.16 X1_A1.1 X1_A1.4 X1_A2.1 X1_A2.4 X2_D1.1 X2_D1.4 X2_D2.1 X2_D2.4 | length 81
  Top w0.15: C13_D2.2 5.3,5.625 5.525,5.85 5.525,7.15 ; C14_D2.2 5.5,7.125 5.525,7.15 ; C13_D1.2 5.3,15.375 5.525,15.6 5.525,16.9 ; C14_D1.2 5.5,16.875 5.525,16.9 ; U6_D2.20 8.4,2.625 v1(8.425,2.65) ; U6_D2.11 6.9,8.45 v1(5.525,8.45) 5.525,7.15 ; U6_D1.20 8.4,12.375 v1(8.425,12.4) ; U6_D1.11 6.9,18.2 v1(5.525,18.2) 5.525,16.9 ; C12_D2.2 v1@18.225,6.625 ; C12_D1.2 v1@18.225,16.375 ; X2_D2.4 X2_D2.1 17.7,7.925 18.225,7.4 v1@18.225,6.625 ; X2_D1.4 X2_D1.1 17.7,17.675 18.225,17.15 v1@18.225,16.375 ; v1(18.25,6.65) v1@18.225,6.625 ; v1(18.25,16.4) v1@18.225,16.375 ; U9.16 v1(22.025,9.975) ; C17.2 30.1,7.375 v1(30.125,7.4) ; C16.2 v1(31.325,13.475) ; v1(38.01,25.4) U1.28@38.01,27.455 ; U5_A2.16 v1(55.436,17.306) ; U5_A2.12 v1(55.436,22.386) ; U5_A2.10 v1(55.436,24.926) ; U5_A1.16 v1(55.475,3.78) ; U5_A1.12 v1(55.475,8.86) ; U5_A1.10 v1(55.475,11.4) ; C8_A2.2 67.976,19.251 68.476,18.751 v1(68.476,18.251) 68.476,18.076 67.976,17.576 X1_A2.4 X1_A2.1 X1_A2.1@66.951,16.251 ; C7_A2.2 v1(68.176,25.251) ; C8_A1.2 68.015,5.725 68.515,5.225 v1(68.515,4.725) 68.515,4.55 68.015,4.05 X1_A1.4 X1_A1.1 X1_A1.1@66.99,2.725 ; C7_A1.2 v1(68.215,11.725)
  Top w0.3: v1(20.4,16.9) 20.525,17.025 U7.16 ; U8.16 v1(22.025,1.9) ; C15.2 30.3,20 v1(31.6,20) 32.925,20 C3.1 ; C3.1@33.075,20.2 C3.1 ; U1.1 33.235,20.04 C3.1 ; U3.16 37.2,6.4 38.125,5.475 C4.2 38.125,3.125 v1(38.1,3.1) ; v1(43.3,7.4) 44.225,6.475 C1.1 ; U4.4 U4.3 43.9,4.525 43.9,5.7 44.325,6.125 C1.1 ; U2.4 43.95,7.85 44.4,7.4 44.4,6.55 C1.1
pads on no net: U1.13 U1.15 U1.16 U1.17 U1.18 U1.19 U1.29 U1.30 U1.31 U1.32 U5_A1.1 U5_A1.15 U5_A2.1 U5_A2.15 U6_D1.7 U6_D1.9 U6_D1.16 U6_D2.7 U6_D2.9 U6_D2.16

## Polygon pours and split planes (outlines as drawn)
VCC on VCC (split plane): 69.49,0.51 0.51,0.51 0.51,29.49 69.49,29.49
GND on GND (split plane): 69.49,0.51 0.51,0.51 0.51,29.49 69.49,29.49

## Silkscreen, mask and mechanical layers (free items; w line width, h text height)
Mechanical 1:
  lines w0.05: -188.912,-151.651 -165.544,-151.651 ; -188.912,-150.781 -165.544,-150.781 ; -164.32,-156.079 -190.136,-156.079 cw(c-190.136,-155.779) -190.436,-155.779 -190.436,-149.775 cw(c-190.136,-149.775) -190.136,-149.475 -164.32,-149.475
  text "Layer Stack Up Detail for: COMSXXXX_Comms_Board_Miniaturization.PcbDoc" at -188.912,-150.383 h1
  text "Layer" at -188.912,-151.106 h1
  text "Name" at -188.912,-151.506 h1
  text "Top Layer" at -188.912,-152.295 h1
  text "VCC" at -188.912,-153.121 h1
  text "Internal Plane 1" at -188.912,-153.946 h1
  text "Bottom Layer" at -188.912,-154.772 h1